# Altium PCB DW1000Breakout.PcbDoc (part 2 of 2)
Units mil, origin at the board's own origin, x right, y up, seen from the top; angles counter-clockwise.
Board outline 2406.34 x 2150.41 mil, 4 copper layers (Component Side, Ground Plane, Power Plane, Solder Side), stack 58 mil thick; 76 components, 60 nets, 321 pads, 242 vias.
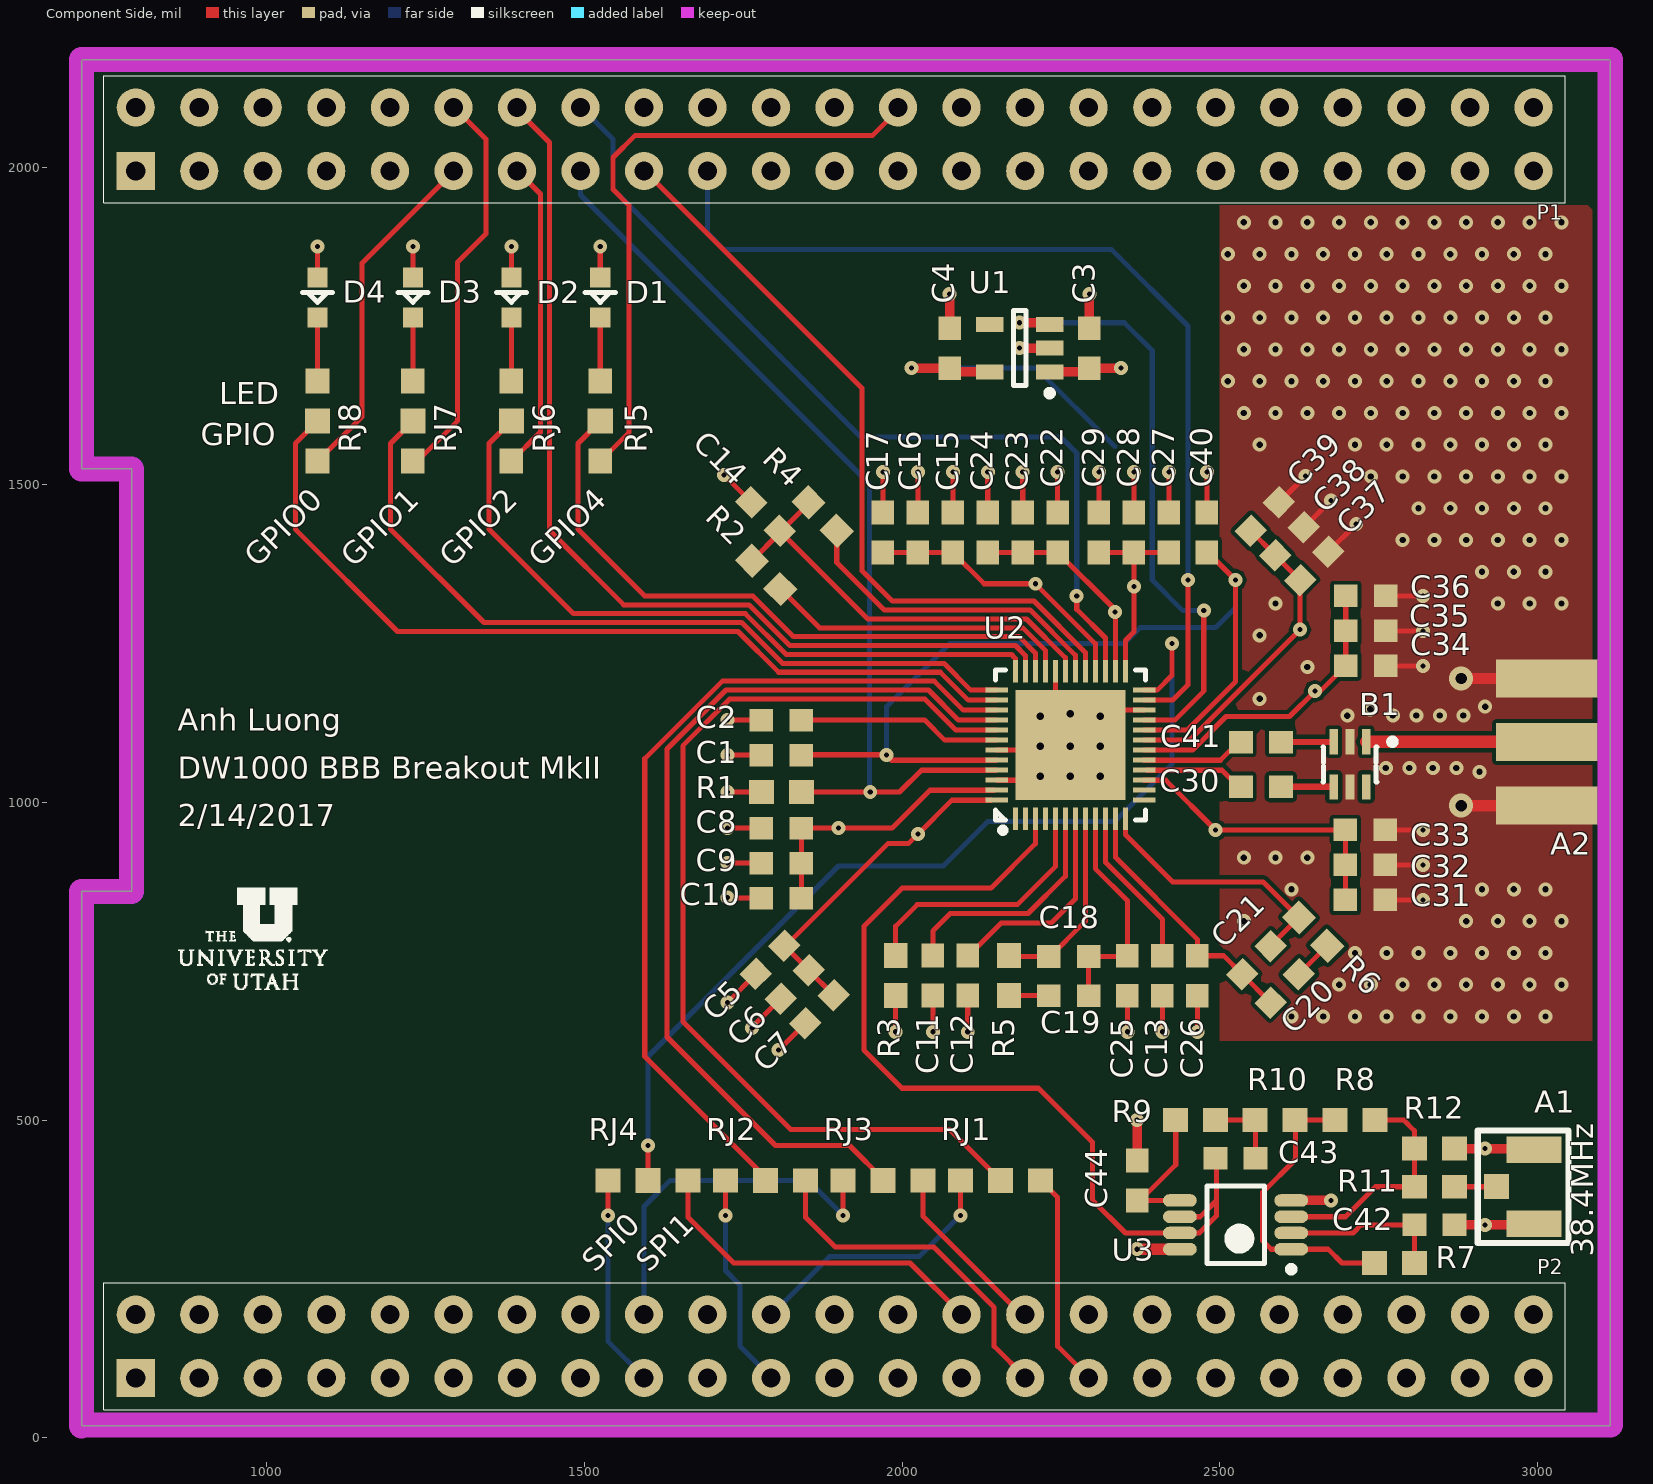
[diagram p0: Component Side view]

## Via types
v1: diameter 22, hole 10, Component Side to Solder Side, tented both sides, 161 vias
v2: diameter 22, hole 8, Component Side to Solder Side, tented both sides, 70 vias
v3: diameter 23.62, hole 11.81, Component Side to Solder Side, 9 vias
v4: diameter 38, hole 18, Component Side to Solder Side, tented both sides, 2 vias

## Nets (pads, with @x,y where several pads share a name; then routed paths per layer and width w, separated by ;. In a path a pad name is that pad's centre, name@x,y a point inside that pad or via, vN(x,y) a via of type N, cw(c..) or ccw(c..) an arc to the next point about the centre after c; other vN are vias at no path point) (continued)
NetR7_2: (continued)
  Component Side w8: R8.2 2619.31,500 2619.31,437.82 2567.76,386.27 2567.76,310.04 2581.18,296.61 U3.1 2670.77,296.61 2692.39,275 R7.2
NetR8_1: R8.1 R11.2 R12.2 U3.3 | length 370.8
  Component Side w8: U3.3 2698.01,347.8 2745.21,395 R11.2 2806.5,453.5 R12.2@2805,455 ; R8.1@2745,500 2789.74,500 2806.5,483.24 R12.2
RESET: P1.16 U2.27 | length 1414
  Component Side w8: v2(2275,1325) 2275,1303.83 2320.12,1258.71 U2.27
  Solder Side w8: P1.16@1495,2093.81 1545,2043.81 1545,1965 1935,1575 2250,1575 2275,1550 v2(2275,1325)
SPI0_CS_EX: P2.17 RJ4.2 | length 335.2
  Component Side w8: v2(1537.01,350) RJ4.2
  Solder Side w8: v2(1537.01,350) 1537.01,151.8 P2.17@1595,93.81
SPI0_MISO: P2.18 RJ3.2 | length 581.8
  Component Side w8: v2(1907.01,350) RJ3.2
  Solder Side w8: P2.18@1593.83,190 P2.18 1593.83,363.83 1635,405 1852.01,405 v2(1907.01,350)
SPI0_MOSI: P2.21 RJ2.2 | length 339.8
  Component Side w8: v2(1722.01,350) RJ2.2
  Solder Side w8: v2(1722.01,350) 1722.01,262.99 1745,240 1745,143.83 P2.21@1793.83,95
SPI0_SCK: P2.22 RJ1.2 | length 416.7
  Component Side w8: v2(2092.01,350) RJ1.2
  Solder Side w8: P2.22@1795,193.81 1886.19,285 2027.01,285 v2(2092.01,350)
SPI1_CS_EX: P2.28 RJ4.3 | length 557.3
  Component Side w8: RJ4.3@1662.99,410 1662.99,347.01 1735,275 2012.64,275 P2.28
SPI1_MISO: P2.30 RJ3.3 | length 283
  Component Side w8: RJ3.3 2032.99,348.52 2191.51,190 P2.30@2193.83,190
SPI1_MOSI: P2.29 RJ2.3 | length 545.7
  Component Side w8: RJ2.3 1847.99,347.01 1895,300 2050,300 2145,205 2145,143.81 P2.29@2195,93.81
SPI1_SCK: P2.31 RJ1.3 | length 341.4
  Component Side w8: RJ1.3 2245,377.99 2245,143.8 P2.31@2293.8,95
SPI_CS_EX: RJ4.1 U2.24 | length 1504.1
  Component Side w8: RJ4.1 v2(1600,460) ; U2.24 2401.61,1176.61 2425,1200 v2(2425,1250)
  Solder Side w8: v2(1600,460) 1600,600 1900,900 2065,900 2135,970 2335,970 2425,1060 v2(2425,1250)
SPI_MISO: RJ3.1 U2.40 | length 1465.8
  Component Side w8: RJ3.1@1972.19,405 1917.19,460 1800.81,460 1630,630.81 1630,1083.87 1722.94,1176.81 2041.66,1176.81 2089.09,1129.39 2096.5,1129.39 U2.40
SPI_MOSI: RJ2.1 U2.39 | length 1360.7
  Component Side w8: RJ2.1@1785,410 1595,600 1595,1068.67 1717.15,1190.81 2050.8,1190.81 2096.5,1145.12 U2.39
SPI_SCK: RJ1.1 U2.41 | length 1582.4
  Component Side w8: U2.41 2085.06,1113.62 2035.87,1162.81 1728.74,1162.81 1655,1089.07 1655,655 1825,485 2075,485 RJ1.1
SYNC: P1.17 U2.29 | length 1205.5
  Component Side w8: P1.17@1595,1993.81 1937,1651.81 1937,1364.62 1984.81,1316.81 2207.57,1316.81 2288.62,1235.76 U2.29
VDDCLK: C18.1 C19.2 C25.2 U2.9 | length 362.8
  Component Side w8: C18.1@2290,758.61 2293.8,754.8 C19.2 ; C18.1 C25.2@2355,757.4 ; U2.9@2304.37,975 U2.9 2304.37,895.63 2354.89,845.11 C25.2
VDDDIG: C1.2 C40.2 U2.20 U2.44 | length 1444.3
  Component Side w8: C1.2@1841.5,1075 1975,1075 v2(1975.63,1074.37) 1983.62,1066.38 U2.44 ; U2.20 2448.56,1113.62 2525,1190.06 v2(2525,1350) C40.2@2480,1395
  Solder Side w8: v2@1975,1074.37 v2(1975.63,1074.37) 1975.63,1150.63 2075,1250 2350,1250 2375,1275 2493.43,1275 2525,1306.57 v2(2525,1350)
VDDIF: C12.2 U2.7 | length 332.9
  Component Side w8: C12.2@2103.48,757.4 2156.08,810 2235,810 2272.87,847.87 U2.7
VDDIO: C2.2 U2.42 | length 320.7
  Component Side w8: C2.2@1841.5,1130 2035.25,1130 2067.38,1097.87 U2.42
VDDMS: C11.2 U2.6 | length 367.1
  Component Side w8: C11.2@2048.48,765 2048.48,797.67 2075.8,825 2198.48,825 2257.13,883.65 U2.6
VDDSYN: C13.2 U2.10 | length 253.7
  Component Side w8: U2.10 2320.12,905.75 2410,815.87 C13.2@2410,757.4
VDDVCO: C20.2 C21.2 C26.2 U2.11 | length 413.3
  Component Side w8: U2.11 2335.87,913.5 2464.89,784.48 C26.2 2506.27,758.61 C21.2@2535,729.88 ; C21.2 2579.28,685.56 C20.2@2580,685.56
WAKEUP: P1.19 U2.23 | length 1559.4
  Component Side w8: U2.23 2425.87,1160.87 2450,1185 v2(2450,1349.8)
  Solder Side w8: P1.19@1693.83,1995 P1.19 1693.83,1896.17 1720,1870 2330,1870 2450,1750 v2(2450,1349.8)
pads on no net: B1.6 P1.3 P1.4 P1.5 P1.6 P1.7 P1.8 P1.9 P1.10 P1.18 P1.20 P1.21 P1.22 P1.23 P1.24 P1.25 P1.27 P1.28 P1.29 P1.30 P1.31 P1.32 P1.33 P1.34 P1.35 P1.36 P1.37 P1.38 P1.39 P1.40 P1.41 P1.42 P1.43 P1.44 P1.45 P1.46 P2.5 P2.6 P2.7 P2.8 P2.9 P2.10 P2.11 P2.12 P2.13 P2.14 P2.15 P2.16 P2.19 P2.20 P2.23 P2.24 P2.25 P2.26 P2.27 P2.32 P2.33 P2.34 P2.35 P2.36 P2.37 P2.38 P2.39 P2.40 P2.41 P2.42 U1.4 U2.1 U2.2 U2.4 U2.13 U2.14 U2.Paste1 U2.Paste2 U2.Paste3 U2.Paste4 U2.Paste5 U2.Paste6 U2.Paste7 U2.Paste8 U2.Paste9

## Polygon pours and split planes (outlines as drawn)
GND on Component Side "GND_L01_P006" (solid, remove dead copper, pour order 6): 3115,1940.07 2500,1939.88 2500,625 3115,625
1V8 on Solder Side "1V8_L04_P004" (solid, remove dead copper, pour order 4): 708.66,2169.14 3115,2167.91 3115,18.78 708.66,18.78
GND on Ground Plane (split plane): 3094.9,38.83 728.76,38.83 728.76,839.9 787.4,839.9 791.32,840.29 795.09,841.43 798.57,843.29 801.61,845.79 804.11,848.83 805.97,852.31 807.11,856.08 807.5,860 807.5,1525 807.11,1528.92 805.97,1532.69 804.11,1536.17 801.61,1539.21 798.57,1541.71 795.09,1543.57 791.32,1544.71 787.4,1545.1 728.76,1545.1 728.76,2149.04 3094.9,2149.04
3V3 on Power Plane (split plane): 3094.9,38.83 728.76,38.83 728.76,839.9 787.4,839.9 791.32,840.29 795.09,841.43 798.57,843.29 801.61,845.79 804.11,848.83 805.97,852.31 807.11,856.08 807.5,860 807.5,1525 807.11,1528.92 805.97,1532.69 804.11,1536.17 801.61,1539.21 798.57,1541.71 795.09,1543.57 791.32,1544.71 787.4,1545.1 728.76,1545.1 728.76,2149.04 3094.9,2149.04

## Keep-outs
Keep-Out Layer:
  lines w39.37: 708.66,18.73 708.66,860 787.4,860 787.4,1524.41 708.66,1524.41 708.66,2169.14 3115,2169.14 ; 708.66,20 3115,20
  lines w40: 3115,20 3115,920 3115,1220 3115,2169.14

## Silkscreen, mask and mechanical layers (free items; w line width, h text height)
Top Overlay:
  drawing of 818 lines, arcs and shapes, not listed
  text "LED" at 925,1615 h60
  text "GPIO" at 896,1550 h60
  text "GPIO0" at 993.83,1360 h60 r45
  text "GPIO1" at 1145.83,1360 h60 r45
  text "GPIO2" at 1300.83,1360 h60 r45
  text "GPIO4" at 1440.83,1360 h60 r45
  text "Anh Luong" at 860,1100.63 h60
  text "DW1000 BBB Breakout MkII" at 860,1025.63 h60
  text "2/14/2017" at 860,950.63 h60
  text "38.4MHz" at 3100,285 h60 r90
  text "SPI0" at 1525,250 h60 r45
  text "SPI1" at 1610,250 h60 r45
Mechanical 1:
  lines w3.94: 18.82,1918.82 cw(c268.82,1918.82) 268.82,2168.82 ; 19.29,269.68 19.29,1921.26 ; 19.68,269.68 ccw(c269.68,269.68) 269.68,19.68 ; 262.8,19.37 2918.83,19.39 ; 268.83,2168.7 2918.83,2168.7 ; 2918.82,18.82 ccw(c2918.82,518.82) 3418.82,518.82 ; 2918.82,2168.82 cw(c2918.82,1668.82) 3418.82,1668.82 ; 3418.7,499.02 3418.7,1668.82
Mechanical 3:
  lines w1: 18.83,268.81 ccw(c268.83,268.81) 268.83,18.81 2918.83,18.81 ccw(c2918.83,518.81) 3418.83,518.81 3418.83,1668.81 ccw(c2918.83,1668.81) 2918.83,2168.81 268.83,2168.81 ccw(c268.83,1918.81) 18.83,1918.81 18.83,268.81
Mechanical 27:
  lines w10: 708.66,18.73 708.66,860 787.4,860 787.4,1525 708.66,1525 708.66,2169.14 3115,2169.14 3115,1220 3115,920 3115,18.73 708.66,18.73

## Dimensions
3115,20 to 708.66,18.73 on Mechanical 1
3115,20 to 3115,2169.14 on Mechanical 1